# Altium PCB NeuroBB_B.PcbDoc
Units mil, origin at the board's own origin, x right, y up, seen from the top; angles counter-clockwise.
Board outline 3000 x 1650 mil, 2 copper layers (Top Layer, Bottom Layer); 60 components, 32 nets, 144 pads, 79 vias.
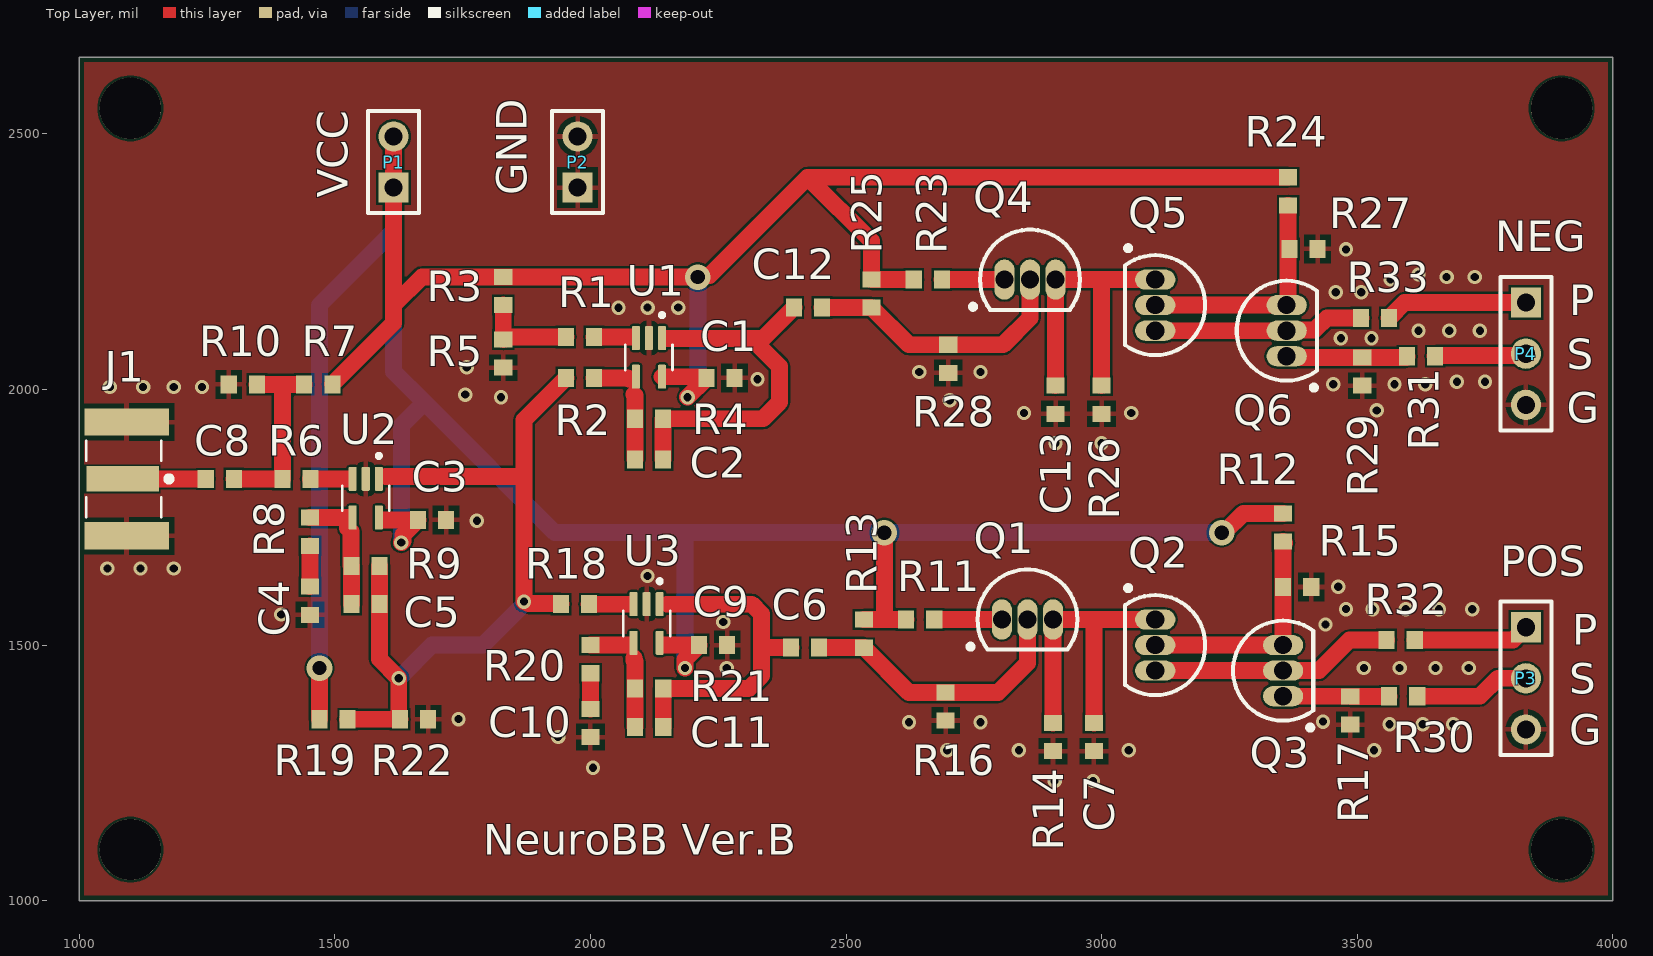
[diagram p0: Top Layer view]
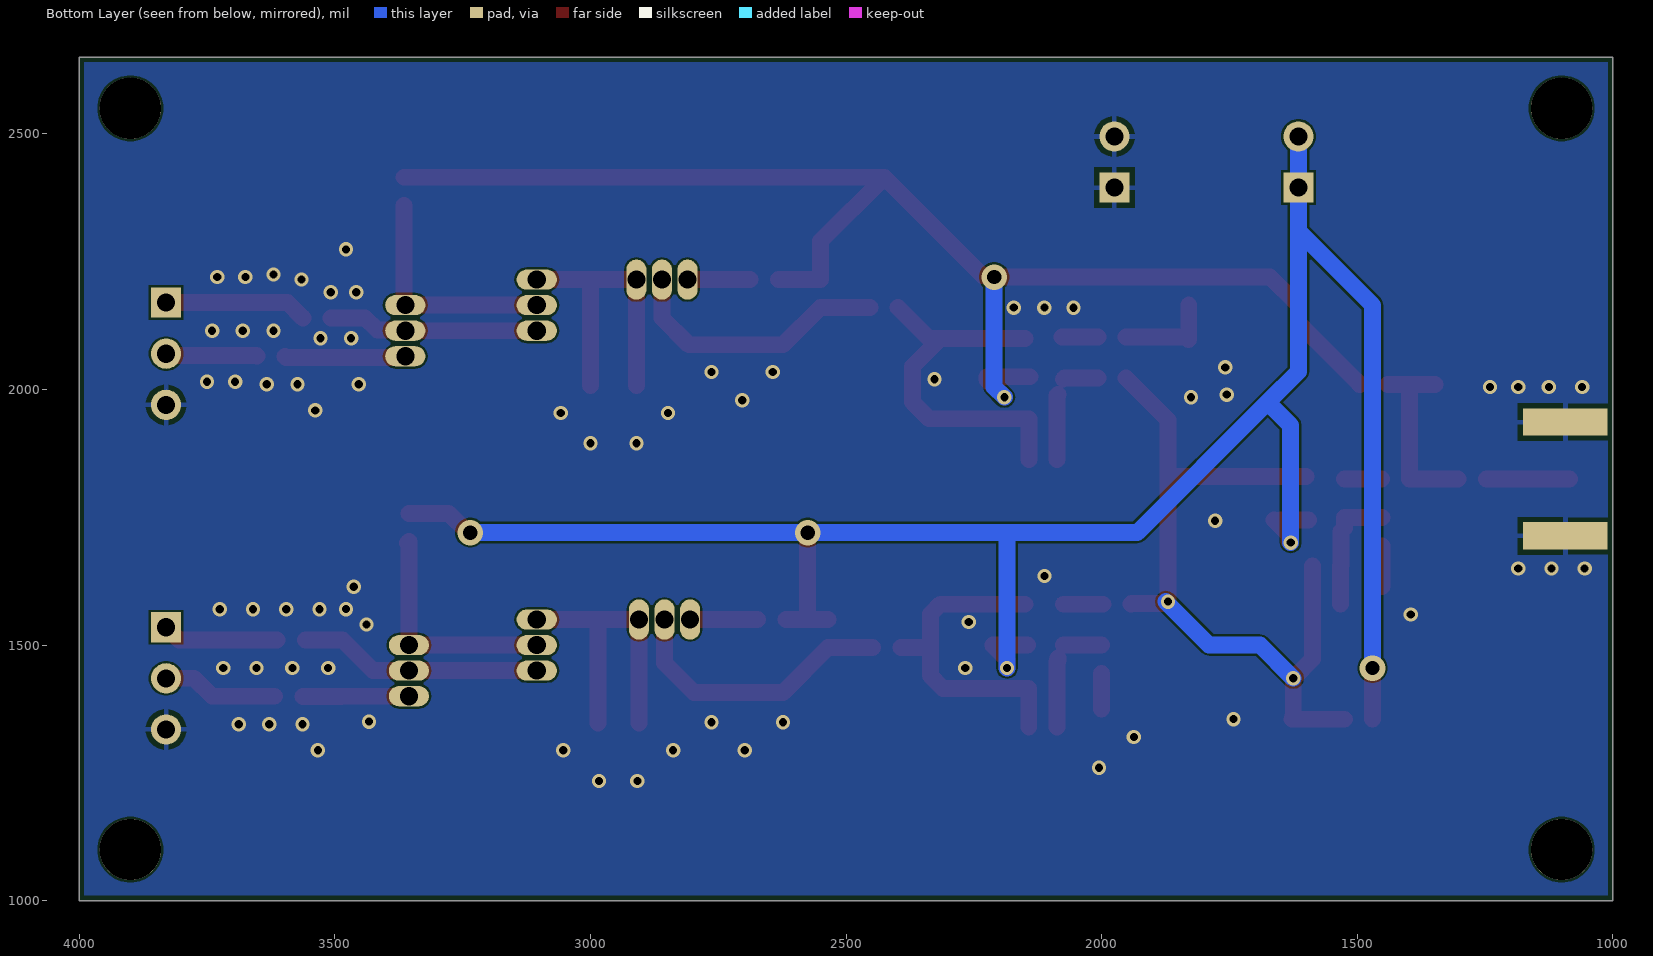
[diagram p1: Bottom Layer view, seen from below]

## Layer stack, top to bottom
Top Solder: solder mask 0.4, Solder Resist, Dk 3.5
Top Layer: signal copper 1.4
Dielectric 1: dielectric 12.6, FR-4, Dk 4.8
Bottom Layer: signal copper 1.4
Bottom Solder: solder mask 0.4, Solder Resist, Dk 3.5

## Board outline
1000,1000 4000,1000 4000,2650 1000,2650

## Design rules (kind name [scope] priority, off if disabled: settings)
BoardOutlineClearance [All] p1: gap=10 ignorepadtopadclearanceinfootprint=FALSE except(0: Arc-SplitContinuation Track-SplitContinuation SMDPad-SplitContinuation THPad-SplitContinuation Via-SplitContinuation Fill-SplitContinuation Poly-SplitContinuation Region-SplitContinuation Text-SplitContinuation)
Clearance [All] p1: gap=4 ignorepadtopadclearanceinfootprint=FALSE except(0: Arc-Hole Track-Hole SMDPad-Hole THPad-Hole Via-Hole Fill-Hole Poly-Hole Region-Hole Text-Hole)
HoleSize [All] p1: absolutevalues=TRUE maxlimit=150 minlimit=1 maxpercent=80.000 minpercent=20.000
MinimumSolderMaskSliver [All] p1: minsoldermaskwidth=4
PolygonConnect [All] p1: thpad.connectstyle=Relief thpad.reliefconductorwidth=10 thpad.reliefentries=4 thpad.polygonreliefangle="90 Angle" thpad.airgapwidth=10 smdpad.connectstyle=Relief smdpad.reliefconductorwidth=10 smdpad.reliefentries=4 smdpad.polygonreliefangle="90 Angle" smdpad.airgapwidth=10 via.connectstyle=Direct via.reliefconductorwidth=10 via.reliefentries=4 via.polygonreliefangle="90 Angle" via.airgapwidth=10
RoutingVias [All] p1: holewidth=10 width=20 viastyle="Through Hole" minholewidth=6 minwidth=12 maxholewidth=50 maxwidth=50
SilkToSilkClearance [All] p1: silktosilkclearance=4
SilkToSolderMaskClearance [IsPad] p1: minsilkscreentomaskgap=4 clearancetoexposedcopper=TRUE
SolderMaskExpansion [All] p1: expansion=4 istentingtop=FALSE
Width [All] p1: maxlimit=50 minlimit=10 preferedwidth=33
26 further rules are at their usual default settings.

## Classes and differential pairs
component class U_SPK_P: C6 C7 Q1 Q2 Q3 R11 R12 R13 R14 R15 R16 R17 R30 R32
component class U_SPK_N: C12 C13 Q4 Q5 Q6 R23 R24 R25 R26 R27 R28 R29 R31 R33
component class U_AMP_P2: C9 C10 C11 R18 R19 R20 R21 R22 U3
component class U_AMP_P1: C3 C4 C5 R6 R7 R8 R9 R10 U2
component class U_AMP_N2: C1 C2 R1 R2 R3 R4 R5 U1
component class NeuroBB: C8 J1 P1 P2 P3 P4

## Components (designator, comment, footprint, x,y, rotation, side; value= is the part's Value field where it differs from the comment)
C1 "1uF" SMD-0603 2254.53,2022.8 r180 top
C2 "15nF" SMD-0603 2114.53,1862.8 r0 top
C3 "1uF" SMD-0603 1690.12,1745 r180 top
C4 "47uF" SMD-0603 1451.34,1586.74 r90 top
C5 "15nF" SMD-0603 1560.12,1580 r0 top
C6 "10uF" SMD-0603 2420,1495 r0 top
C7 "47p" SMD-0603 2985,1320 r90 top
C8 "10uF" SMD-0603 1275,1825 r0 top
C9 "1uF" SMD-0603 2240,1500 r180 top
C10 "47uF" SMD-0603 2000,1347.44 r90 top
C11 "15nF" SMD-0603 2115,1340 r0 top
C12 "10uF" SMD-0603 2425.53,2160.46 r0 top
C13 "47p" SMD-0603 2910,1980 r90 top
J1 "SMA-J-P-H-ST-EM1" SMA-J-P-H-ST-EM1 1085,1825 r270 top
P1 "Header 2" HDR1X2 1615,2395 r90 top
P2 "Header 2" HDR1X2 1975,2395 r90 top
P3 "Header 3" HDR1X3 3830,1535 r270 top
P4 "Header 3" HDR1X3 3830,2170 r270 top
Q1 "2N3906" TO-92A#1 2855,1550 r270 top
Q2 "2N3906" TO-92A#2 3105,1500 r180 top
Q3 "2N3904" TO-92A#1 3355,1450 r0 top
Q4 "2N3906" TO-92A#1 2860,2215 r270 top
Q5 "2N3906" TO-92A#1 3105,2165 r180 top
Q6 "2N3904" TO-92A#1 3362.06,2115 r0 top
R1 "1M" SMD-0603 1979.53,2102.8 r0 top
R2 "10k" SMD-0603 1979.53,2022.8 r0 top
R3 "1M" SMD-0603 1829.53,2192.8 r90 top
R4 "1M" SMD-0603 2114.53,1942.8 r0 top
R5 "1M" SMD-0603 1829.53,2070.24 r90 top
R6 "1M" SMD-0603 1425.12,1825 r0 top
R7 "1M" SMD-0603 1467.56,2010 r0 top
R8 "10k" SMD-0603 1451.34,1721.68 r90 top
R9 "1M" SMD-0603 1560.12,1655 r0 top
R10 "1M" SMD-0603 1320.12,2010 r0 top
R11 "30M" SMD-0603 2645,1550 r0 top
R12 "400k" SMD-0603 3355,1730 r90 top
R13 "1.2M" SMD-0603 2535,1522.44 r90 top
R14 "470M" SMD-0603 2905,1320 r90 top
R15 "1M" SMD-0603 3382.6,1613.72 r180 top
R16 "10M" SMD-0603 2695,1380 r90 top
R17 "10k" SMD-0603 3486.48,1371.85 r90 top
R18 "1M" SMD-0603 1970,1580 r0 top
R19 "1M" SMD-0603 1497.56,1355 r180 top
R20 "10k" SMD-0603 2000,1472.56 r90 top
R21 "1M" SMD-0603 2115,1415 r0 top
R22 "1M" SMD-0603 1655.12,1355 r180 top
R23 "30M" SMD-0603 2660,2215 r0 top
R24 "400k" SMD-0603 3365,2387.56 r90 top
R25 "1.2M" SMD-0603 2549.84,2187.99 r90 top
R26 "470M" SMD-0603 3000,1980 r90 top
R27 "1M" SMD-0603 3395,2275 r180 top
R28 "10M" SMD-0603 2700,2060 r90 top
R29 "10k" SMD-0603 3510,2035 r90 top
R30 "51" SMD-0603 3590,1400 r0 top
R31 "51" SMD-0603 3625,2065 r0 top
R32 "51" SMD-0603 3585,1510 r180 top
R33 "51" SMD-0603 3535,2140 r180 top
U1 "TLV521DCKT" TLV521-SOT-5N 2114.53,2062.8 r270 top
U2 "TLV521DCKT" TLV521-SOT-5N 1560.5,1787.41 r270 top
U3 "TLV521DCKT" TLV521-SOT-5N 2110,1542.2 r270 top

## Footprints (in the part's own frame and the unit in brackets; to place one, negate y for a bottom-side part, rotate by r counter-clockwise, add the part's x,y. Pads: shape width x height; smd on the part's side, far side on the other; paste and mask are expansions set on the pad)
HDR1X2 [mm] "Connector; Header; 2 Position"
  rect 1.5x1.5 hole 0.9: 1(0,0)
  round 1.5 hole 0.9: 2(2.54,0)
  silkscreen extent -1.27,-1.27 3.81,1.27
HDR1X3 [mm] "Connector; Header; 3 Position"
  rect 1.5x1.5 hole 0.9: 1(0,0)
  round 1.5 hole 0.9: 2(2.54,0) 3(5.08,0)
  silkscreen extent -1.27,-1.27 6.35,1.27
SMA-J-P-H-ST-EM1 [mm] "SMA-J-P-H-ST-EM1"
  rect 1.27x3.6 smd: 1(0,0)
  rect 1.35x4.2 smd: 2_1(-2.825,0.2) 3_1(2.825,0.2)
  rect 1.35x4.2 smd far side: 2_2(-2.825,0.2) 3_2(2.825,0.2)
  silkscreen extent -1.9,-1.8 1.9,2.44
SMD-0603 [mm] "SMD Body 1.6x0.8mm, IPC High Density"
  rect 0.8x0.9 smd: 1(-0.7,0) 2(0.7,0)
  body extent -0.87,-0.48 0.87,0.48, height 1.3
TLV521-SOT-5N [mm] "TLV521 NanoPower, 350nA, RRIO, CMOS Input, Operational Amplifier"
  rrect25% 1.19x0.4 smd mask+0.051: 1(-0.96,0.65) 2(-0.96,0) 3(-0.96,-0.65) 4(0.96,-0.65) 5(0.96,0.65)
  silkscreen extent -2.2,-1.17 0.63,1.17
TO-92A#1 [mm] "TO, Flat Index; 3 In-Line, Axial Leads; Body Dia. 4.5mm; Leads 0.51 x 0.48 mm (max)"
  oval 2x1 hole 0.9 mask+0.051: 1(0,-1.27) 2(0,0) 3(0,1.27)
  silkscreen extent -2.48,-2.95 1.5,2.48, body extent -2.48,-2.5 1.5,2.5, height 6.86
TO-92A#2 [mm] "TO, Flat Index; 3 In-Line, Axial Leads; Body Dia. 4.5mm; Leads 0.51 x 0.48 mm (max)"
  oval 2x1 hole 0.9 paste+0 mask+0.051: 1(0,-1.27)
  oval 2x1 hole 0.9 mask+0.051: 2(0,0) 3(0,1.27)
  silkscreen extent -2.48,-2.95 1.5,2.48, body extent -2.48,-2.5 1.5,2.5, height 6.86

## Part data
C1 C2 C3 C4 C5 C6 C7 C8 C9 C10 C11 C12 C13: library part CAP0603, "Ceramic Capacitor 0603"
J1: "Connector SMA F 50Ohm Solder ST Edge Mount Gold Over Nickel Tray", Package=None, Availability=Unavailable, MF=Samtec, MP=SMA-J-P-H-ST-EM1, Price=None, SnapEDA_Link=https://www.snapeda.com/parts/SMA-J-P-H-ST-EM1/Samtec%20Inc./view-part/?ref=snap
P1 P2: "Header, 2-Pin", LatestRevisionDate=17-Jul-2002, LatestRevisionNote="Re-released for DXP Platform.", Publisher="Altium Limited"
P3 P4: "Header, 3-Pin", LatestRevisionDate=17-Jul-2002, LatestRevisionNote="Re-released for DXP Platform.", Publisher="Altium Limited"
Q1 Q2 Q4 Q5: "PNP General Purpose Amplifier", ComponentLink1Description="Manufacturer Link", ComponentLink1URL=http://www.fairchildsemi.com/, ComponentLink2Description=Datasheet, ComponentLink2URL=http://www.fairchildsemi.com/ds/2N%2F2N3906.pdf, DatasheetVersion=1997, LatestRevisionDate=15-Jan-2003, LatestRevisionNote="PCB Footprint 'BCY-W3/D4.7' replaced", PackageDescription="TO, Flat Index; 3 In-Line, Axial Leads; Body Dia. 4.5mm; Leads 0.51 x 0.48 mm (max)", PackageReference=TO-92A, PackageVersion=Sep-1998, Published=8-Jun-2000, Publisher="Altium Limited"
Q3 Q6: "NPN General Purpose Amplifier", ComponentLink1Description="Manufacturer Link", ComponentLink1URL=http://www.fairchildsemi.com/, ComponentLink2Description=Datasheet, ComponentLink2URL=http://www.fairchildsemi.com/ds/2N%2F2N3904.pdf, DatasheetVersion=1997, LatestRevisionDate=15-Jan-2003, LatestRevisionNote="PCB Footprint 'BCY-W3/D4.7' replaced", PackageDescription="TO, Flat Index; 3 In-Line, Axial Leads; Body Dia. 4.5mm; Leads 0.51 x 0.48 mm (max)", PackageReference=TO-92A, PackageVersion=Sep-1998, Published=8-Jun-2000, Publisher="Altium Limited"
R1 R2 R3 R4 R5 R6 R7 R8 R9 R10 R11 R12 R13 R14 R15 R16 R17 R18 R19 R20 R21 R22 R23 R24 R25 R26 R27 R28 R29 R30 R31 R32 R33: library part RES0603, "Resistor-0603"
U1 U2 U3: "350-nA Nanopower, Single, RRIO, CMOS Input, Operational Amplifier for Cost-Sensitive Systems 5-SC70 -40 to 125", Package="SOT-SC70-5 Texas Instruments", Arrow_Electronics-Purchase-URL=https://snapeda.com/shop?store=Arrow+Electronics&id=809196, Availability=Unavailable, DigiKey-Purchase-URL=https://snapeda.com/shop?store=DigiKey&id=809196, MF="Texas Instruments", Mouser-Purchase-URL=https://snapeda.com/shop?store=Mouser&id=809196, MP=TLV521DCKT, Price=None, SnapEDA_Link=https://www.snapeda.com/parts/TLV521DCKT/Texas%20Instruments/view-part/809196/?ref=snap, Texas_Instruments-Purchase-URL=https://snapeda.com/shop?store=Texas+Instruments&id=809196

## Free pads (board coordinates)
  round 120 hole 120 unplated: 1(1100,1100) 1(1100,2550) 1(3900,1100) 1(3900,2550)

## Via types
v1: diameter 28, hole 16, Top Layer to Bottom Layer, tented both sides, 75 vias
v2: diameter 50, hole 28, Top Layer to Bottom Layer, tented both sides, 4 vias

## Nets (pads, with @x,y where several pads share a name; then routed paths per layer and width w, separated by ;. In a path a pad name is that pad's centre, name@x,y a point inside that pad or via, vN(x,y) a via of type N, cw(c..) or ccw(c..) an arc to the next point about the centre after c; other vN are vias at no path point)
GND: C1.1 C3.1 C4.1 C7.1 C9.1 C10.1 C13.1 J1.2_1 J1.2_2 J1.3_1 J1.3_2 P2.1 P2.2 P3.3 P4.3 R5.1 R10.1 R14.1 R15.1 R16.1 R17.1 R22.1 R26.1 R27.1 R28.1 R29.1 U1.2 U2.2 U3.2
  other v1: 2908.13,1234.13 2983.13,1234.13 2005,1260 2698.13,1294.13 2838.13,1294.13 3053.13,1294.13 3533.13,1294.13 1936.78,1320.21 3563.09,1345.28 3628.09,1345.28 3688.09,1345.28 2623.13,1349.13 2763.13,1349.13 3433.09,1350.28 1741.9,1355.21 2266.78,1455.21 3513.09,1455.28 3583.09,1455.28 3653.09,1455.28 3718.09,1455.28 3438.09,1540.28 2259.88,1545 1395.12,1560 3478.09,1570.28 3530,1570 3595,1570 3660,1570 3725,1570 3463.13,1614.13 2111.78,1635.21 1055,1650 1120,1650 1185,1650 1777.95,1743.25 2910,1895 3000,1895 2848.13,1954.13 3058.13,1954.13 3538.13,1959.13 2703.13,1979.13 1825,1985 1755,1990 1060,2005 1125,2005 1185,2005 1240,2005 3453.09,2010.28 3573.09,2010.28 3633.09,2010.28 3695,2015 3750,2015 2326.9,2020.21 2643.13,2034.13 2763.13,2034.13 1757.95,2043.25 3468.09,2100.28 3528.09,2100.28 3620,2115 3680,2115 3740,2115 2055.12,2160 2111.9,2160.21 2171.9,2160.21 3458.09,2190.28 3508.09,2190.28 3565,2215 3675,2220 3730,2220 3620,2225 3478.13,2274.13
NetC2_1: C2.1 R2.2 R4.1 U1.4 | length 197.2
  Top Layer w33: R2.2 2072.32,2022.8 2075.12,2020 ; 2085.12,1990 2086.97,1988.15 R4.1 C2.1
NetC2_2: C2.2 C12.1 R4.2 U1.1 | length 742.3
  Top Layer w33: C2.2 R4.2 2337.91,1942.8 2370.12,1975 2370.12,2045 2315.12,2100 ; 2150.12,2100 2315.12,2100 ; C12.1 2397.97,2160 2337.97,2100 2315.12,2100
NetC4_2: C4.2 R8.1 | length 79.8
  Top Layer w33: C4.2 R8.1
NetC5_1: C5.1 R8.2 R9.1 U2.4 | length 247.2
  Top Layer w33: R8.2 1524.36,1749.24 1525.12,1750 1525.12,1728.91 1531.81,1722.22 1531.81,1655.75 R9.1 C5.1
NetC6_1: C6.1 C11.2 R21.2 U3.1 | length 651
  Top Layer w33: C11.2 R21.2 2310,1415 2335,1440 2335,1490 ; 2150,1580 2315.67,1580 2335,1560.67 2335,1490 ; C6.1 2340,1495 2335,1490
NetC6_2: C6.2 Q1.2 R13.1 R16.2 | length 552.5
  Top Layer w33: C6.2 2447.62,1494.94 2535.41,1494.94 2622.79,1407.56 R16.2 2797.56,1407.56 2855,1465 Q1.2
NetC7_2: C7.2 Q1.3 Q2.1 R14.2 | length 607
  Top Layer w33: R14.2 Q1.3 2990,1550 ; C7.2 2985,1545 2990,1550 ; Q2.1 2990,1550
NetC8_1: C8.1 J1.1 | length 162.4
  Top Layer w33: J1.1 C8.1
NetC10_2: C10.2 R20.1 | length 70
  Top Layer w33: C10.2 R20.1
NetC11_1: C11.1 R20.2 R21.1 U3.4 | length 211.1
  Top Layer w33: R20.2 2074.88,1500.12 2075,1500 ; 2085,1475 2085,1470 2087.44,1467.56 R21.1 C11.1
NetC12_2: C12.2 Q4.2 R25.1 R28.2 | length 533.8
  Top Layer w33: C12.2@2453.1,2160.45 R25.1 ; R25.1 2550.3,2160.44 2623.18,2087.56 R28.2 2807.56,2087.56 2860,2140 Q4.2
NetC13_2: C13.2 Q4.3 Q5.1 R26.2 | length 613
  Top Layer w33: C13.2 Q4.3 3007.5,2215 ; R26.2 3000,2207.5 3007.5,2215 ; Q5.1 3007.5,2215
NetP3_1: P3.1 R32.1 | length 227.8
  Top Layer w33: R32.1 3805,1510 P3.1
NetP3_2: P3.2 R30.2 | length 226.9
  Top Layer w33: R30.2 3740,1400 3775,1435 P3.2
NetP4_1: P4.1 R33.1 | length 280.1
  Top Layer w33: R33.1 3562.56,2140.46 3563.31,2141.22 3563.78,2141.22 3592.56,2170 P4.1
NetP4_2: P4.2 R31.2 | length 179.8
  Top Layer w33: R31.2 3652.56,2065.46 3653.31,2066.22 3826.22,2066.22 P4.2
NetQ1_1: Q1.1 R11.2 | length 132.4
  Top Layer w33: R11.2 Q1.1
NetQ2_2: Q2.2 Q3.3 R12.1 R15.2 | length 456.4
  Top Layer w33: Q2.2 Q3.3 R12.1 3355.46,1702.44 R12.1@3357.91,1700
NetQ2_3: Q2.3 Q3.2 R32.2 | length 477.3
  Top Layer w33: Q2.3 3425,1450 3485,1510 R32.2
NetQ3_1: Q3.1 R17.2 R30.1 | length 203.3
  Top Layer w33: Q3.1 R17.2@3482.09,1400 ; R17.2 3486.78,1399.7 3562.14,1399.7 R30.1
NetQ4_1: Q4.1 R23.2 | length 122.4
  Top Layer w33: R23.2 Q4.1
NetQ5_2: Q5.2 Q6.3 R24.1 R27.2 | length 453.3
  Top Layer w33: Q5.2 3360,2165 Q6.3 3365,2167.94 3365,2275 R24.1
NetQ5_3: Q5.3 Q6.2 R33.2 | length 410.7
  Top Layer w33: Q5.3 Q6.2@3360,2115 ; Q6.2 3363.28,2116.22 3416.91,2116.22 3440.69,2140 R33.2
NetQ6_1: Q6.1 R29.2 R31.1 | length 237.7
  Top Layer w33: Q6.1 3383.47,2065 3385.91,2062.56 R29.2 3595.46,2062.56 3597.44,2064.54 R31.1
NetR1_2: R1.2 U1.3 | length 70.2
  Top Layer w33: R1.2 2077.32,2102.8
NetR6_2: R6.2 U2.3 | length 72.4
  Top Layer w33: R6.2 1525.12,1825
NetR18_2: R18.2 U3.3 | length 77.4
  Top Layer w33: R18.2 2075,1580
VBias1: R1.1 R3.1 R5.2 | length 192
  Top Layer w33: R3.1 R5.2 1829.99,2097.8 1834.99,2102.8 R1.1
VBias2: C5.2 R2.1 R9.2 R18.1 R19.1 R22.2 U2.1 | length 1547.1
  Top Layer w33: R19.1 R22.2 1626.81,1355.75 1626.81,1358.81 1625.12,1360.5 v1(1625.12,1435) 1587.68,1472.44 C5.2 R9.2 ; 1600,1830 1870,1830 ; R18.1 1942.44,1580.46 1941.69,1581.22 1878.38,1581.22 1874.6,1585 v1(1870,1585) 1870,1830 ; R2.1 1951.97,2022.33 1870,1940.36 1870,1830
  Bottom Layer w33: v1(1625.12,1435) 1690.12,1500 1789.6,1500 v1@1874.6,1585
VBias3: C8.2 R6.1 R7.1 R10.2 | length 373.4
  Top Layer w33: C8.2 R6.1 1397.56,2007.44 1400.12,2010 ; R10.2 1400.12,2010 ; R7.1 1400.12,2010
VCC: C1.2 C3.2 C9.2 P1.1 P1.2 R3.2 R7.2 R11.1 R12.2 R13.2 R19.2 R23.1 R24.2 R25.2 U1.5 U2.5 U3.5 | length 7513.6
  Top Layer w33: R19.2 v2(1470,1455) ; R7.2 1495.12,2010.46 1615.12,2130.46 ; 1595.12,1745 C3.2@1650.12,1745 ; P1.2 1615.12,2494.88 1615.12,2165 ; 1615.23,2130.35 1615.12,2130.46 ; v1(1630.12,1700.5) 1633.37,1703.75 1633.37,1715.35 1662.56,1744.54 C3.2 ; U1.5 2224.76,2025 2224.76,2019.65 v1(2190.12,1985) ; 2145,1500 C9.2 2212.44,1499.54 2185,1472.09 v1(2185,1455) ; R13.2 2575,1550 ; v2(2575,1720) 2575,1550 ; R11.1 2575,1550 ; R23.1 2632.16,2215.28 2550.11,2215.28 R25.2 2549.84,2290.28 2425,2415.12 ; v2(3235,1720) 3239.6,1720 3277.16,1757.56 R12.2 ; R24.2 2425,2415.12 ; 1615.12,2130.46 1615.12,2165 ; 1615.12,2165 1670.47,2220.35 R3.2 1829.7,2220.18 2209.94,2220.18 v2(2210.12,2220) 2213.37,2223.25 2233.13,2223.25 2425,2415.12
  Bottom Layer w33: v2@1470.12,1454.88 v2(1470,1455) 1470,2164.88 1615.12,2310 ; P1.2 P1.1 1615.12,2394.88 1615.12,2310 ; v1(1630.12,1700.5) 1630.12,1930 1675.12,1975 ; v1(2185,1455) 2185,1720 ; v1(2190.12,1985) 2210.12,2005 v2(2210.12,2220) ; v2(3235,1720) v2(2575,1720) 2185,1720 ; 1615.12,2310 1615.12,2035 1675.12,1975 ; 1675.12,1975 1930.12,1720 2185,1720

## Polygon pours and split planes (outlines as drawn)
GND on Bottom Layer "GND_L02_P001" (solid, pour order 1): 1000,1000 4000,1000 4000,2650 1000,2650
GND on Top Layer "GND_L01_P000" (solid, pour order 0): 1000,1000 4000,1000 4000,2650 1000,2650

## Silkscreen, mask and mechanical layers (free items; w line width, h text height)
Top Overlay:
  text "GND" at 1875,2380 h60 r90
  text "VCC" at 1525,2375 h60 r90
  text "NEG" at 3770,2270 h60
  text "P" at 3915,2145 h60
  text "S" at 3910,2040 h60
  text "G" at 3910,1935 h60
  text "POS" at 3780,1635 h60
  text "P" at 3920.91,1500.33 h60
  text "S" at 3915,1405 h60
  text "G" at 3915,1305 h60
  text "NeuroBB Ver.B" at 1790,1090 h60